# Altium PCB Digital Debugger.PcbDoc
Units mil, origin at the board's own origin, x right, y up, seen from the top; angles counter-clockwise.
Board outline 1000 x 1000 mil, 2 copper layers (Top Layer, Bottom Layer), stack 62.756 mil thick; 29 components, 37 nets, 159 pads, 23 vias.
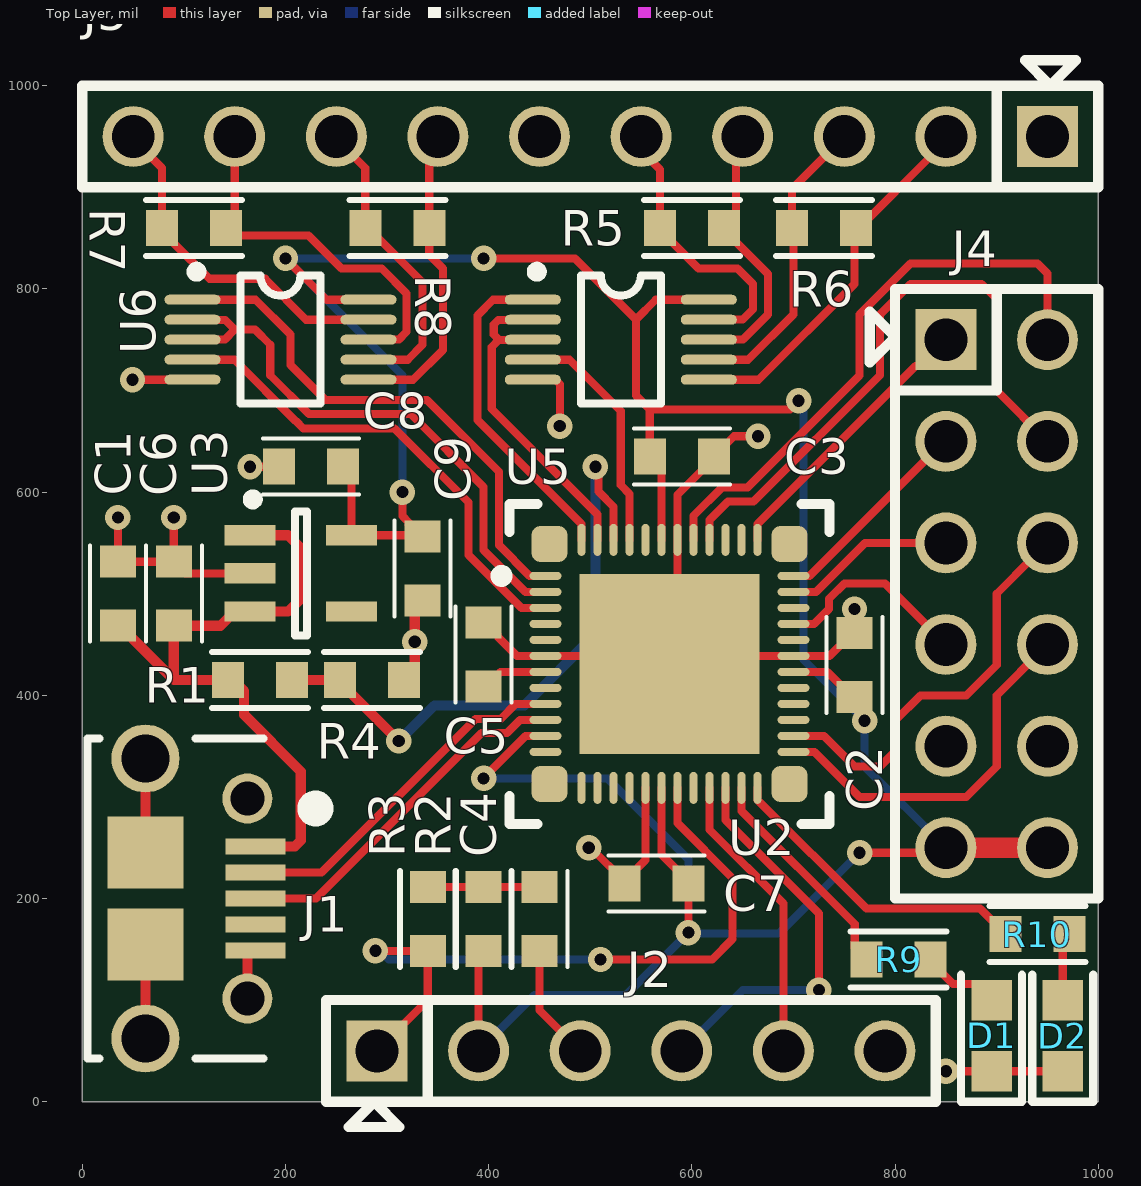
[diagram p0: Top Layer view]
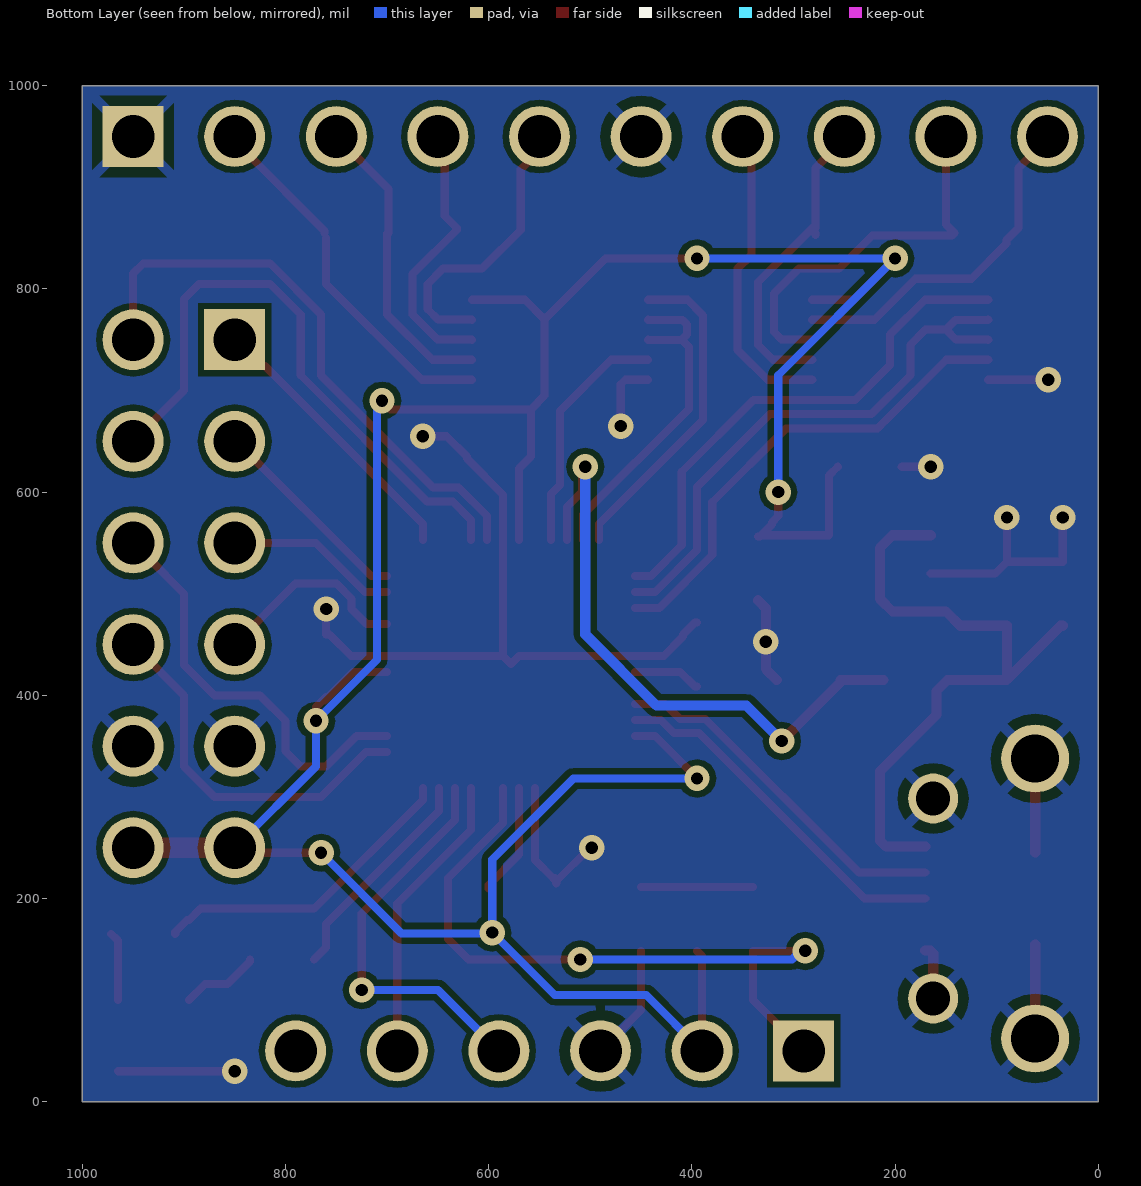
[diagram p1: Bottom Layer view, seen from below]

## Layer stack, top to bottom
Top Solder: solder mask 0.8, SM-001, Dk 4
Top Layer: signal copper 1.378
Dielectric 1: core 60, Core-043, Dk 4.3
Bottom Layer: signal copper 1.378
Bottom Solder: solder mask 0.8, SM-001, Dk 4

## Board outline
0,0 1000,0 1000,1000 0,1000

## Design rules (kind name [scope] priority, off if disabled: settings)
Clearance [All] p1: gap=6 ignorepadtopadclearanceinfootprint=FALSE
DiffPairsRouting [All] p1: maxlimit=7.87 minlimit=3.94 mostfreqgap=4.92 toplayer_minwidth=3.94 toplayer_maxwidth=7.87 toplayer_prefwidth=4.21 bottomlayer_minwidth=3.94 bottomlayer_maxwidth=7.87 bottomlayer_prefwidth=4.21 maxuncoupledlength=500
MinimumSolderMaskSliver [All] p1: minsoldermaskwidth=3
PolygonConnect [All] p1: thpad.connectstyle=Relief thpad.reliefconductorwidth=10 thpad.reliefentries=4 thpad.polygonreliefangle="45 Angle" thpad.airgapwidth=10 smdpad.connectstyle=Relief smdpad.reliefconductorwidth=10 smdpad.reliefentries=4 smdpad.polygonreliefangle="90 Angle" smdpad.airgapwidth=10 via.connectstyle=Direct via.reliefconductorwidth=10 via.reliefentries=4 via.polygonreliefangle="90 Angle" via.airgapwidth=10
RoutingVias [All] p1: holewidth=12 width=25 viastyle="Through Hole" minholewidth=10 minwidth=20 maxholewidth=30 maxwidth=50
SilkToSilkClearance [All] p1: silktosilkclearance=5
SilkToSolderMaskClearance [IsPad] p1: minsilkscreentomaskgap=5 clearancetoexposedcopper=TRUE
SolderMaskExpansion [All] p1: expansion=4 istentingtop=FALSE
Width [All] p1: maxlimit=50 minlimit=6 preferedwidth=8
26 further rules are at their usual default settings.

## Components (designator, comment, footprint, x,y, rotation, side; value= is the part's Value field where it differs from the comment)
C1 "1uF" CAP_0603 35,500 r90 top
C2 "0.1uF" CAP_0603 760,430 r90 top
C3 "1uF" CAP_0603 590,635 r0 top
C4 "0.1uF" CAP_0603 450,180 r270 top
C5 "10uF" CAP_0603 395,440 r90 top
C6 "1uF" CAP_0603 90,500 r90 top
C7 "1uF" CAP_0603 565,215 r180 top
C8 "0.1uF" CAP_0603 225,625 r180 top
C9 "0.1uF" CAP_0603 335,525 r270 top
D1 "Green" DIO_0603 895,65 r270 top
D2 "Green" DIO_0603 965,65 r270 top
J1 "10118194-0001LF" CONN_USB_MICRO_B_RA 5,200 r270 top
J2 "PREC006SAAN-RC" CONN_Male_1x6 540,50 r0 top
J4 "PREC006DAAN-RC" CONN_Male_2x6z 900,500 r0 top
J5 "PREC010SAAN-RC" CONN_Male_1x10 500,950 r180 top
R1 "10k" RES_0603 175,415 r180 top
R2 "10k" RES_0603 395,180 r270 top
R3 "1k" RES_0603 340,180 r90 top
R4 "10k" RES_0603 285,415 r180 top
R5 "120" RES_0603 600,860 r180 top
R6 "120" RES_0603 730,860 r180 top
R7 "120" RES_0603 110,860 r180 top
R8 "120" RES_0603 310,860 r180 top
R9 "1k" RES_0603 803.5,140 r0 top
R10 "1k" RES_0603 940,165 r0 top
U2 "PIC32MM0256GPM048" UQFN-48EP 577.95,430.87 r0 top
U3 "LDLN025M33R" SOT23-5 215,520 r0 top
U5 "ISL3176EIUZ-T" MSOP-10 530,750 r0 top
U6 "ISL3176EIUZ-T" MSOP-10 195,750 r0 top

## Footprints (in the part's own frame and the unit in brackets; to place one, negate y for a bottom-side part, rotate by r counter-clockwise, add the part's x,y. Pads: shape width x height; smd on the part's side, far side on the other; paste and mask are expansions set on the pad)
CAP_0603 [mm] "Capacitor, 0603"
  rect 0.8x0.9 smd: 1(-0.8,0) 2(0.8,0)
  silkscreen extent -1.2,-0.7 1.2,0.7, body extent -0.8,-0.4 0.8,0.4, height 0.86
CONN_Male_1x6 [mil]
  rect 60x60 hole 42: 1(-250,0)
  round 60 hole 42: 2(-150,0) 3(-50,0) 4(50,0) 5(150,0) 6(250,0)
  silkscreen extent -300,-75 300,50, body extent -300,-50 300,50, height 330
CONN_Male_1x10 [mil]
  rect 60x60 hole 42: 1(-450,0)
  round 60 hole 42: 2(-350,0) 3(-250,0) 4(-150,0) 5(-50,0) 6(50,0) 7(150,0) 8(250,0) 9(350,0) 10(450,0)
  silkscreen extent -500,-75 500,50, body extent -500,-50 500,50, height 330
CONN_Male_2x6z [mil]
  rect 60x60 hole 42: 1(-50,250)
  round 60 hole 42: 2(50,250) 3(-50,150) 4(50,150) 5(-50,50) 6(50,50) 7(-50,-50) 8(50,-50) 9(-50,-150) 10(50,-150) 11(-50,-250) 12(50,-250)
  silkscreen extent -125,-300 100,300, body extent -95,-300 95,300, height 323
CONN_USB_MICRO_B_RA [mm] "Amphenol FCI 10118194-0001LF"
  rect 0.4x1.5 smd mask+0.08: 1(-1.3,4.2) 2(-0.65,4.2) 3(0,4.2) 4(0.65,4.2) 5(1.3,4.2)
  round 1.7 hole 1.2: S(-3.5,1.45) S(3.5,1.45)
  round 1.25 hole 0.85: S(-2.5,4) S(2.5,4)
  rect 1.8x1.9 smd mask+0.08: S(-1.15,1.45) S(1.15,1.45)
  silkscreen extent -4,0 4,5.9, body extent -4.02,-1.34 4.02,4.36, height 2.82
DIO_0603 [mil] "Diode, 0603"
  rect 40x40 smd: A(-35,0) K(35,0)
  silkscreen extent -60,-30 65,30, body extent -35,-16 35,16, height 31
MSOP-10 [mm]
  oval 1.4x0.25 smd mask+0.07: 1(-2.2,1) 2(-2.2,0.5) 3(-2.2,0) 4(-2.2,-0.5) 5(-2.2,-1) 6(2.2,-1) 7(2.2,-0.5) 8(2.2,0) 9(2.2,0.5) 10(2.2,1)
  silkscreen extent -2.22,-1.6 1,1.82, body extent -2.52,-1.55 2.53,1.55, height 1.05
RES_0603 [mm] "Resistor, 0603"
  rect 0.8x0.9 smd: 1(-0.8,0) 2(0.8,0)
  silkscreen extent -1.2,-0.7 1.2,0.7, body extent -0.8,-0.4 0.8,0.4, height 0.61
SOT23-5 [mil]
  rect 50x20 smd: 1(-50,37.5) 2(-50,0) 3(-50,-37.5) 4(50,-37.5) 5(50,37.5)
  silkscreen extent -52,-61 6,78, body extent -49,-59 49,59, height 44
UQFN-48EP [mm] "QFN, 48-Pads, Body 6x6mm, Pitch 0.4mm"
  rrect50% 0.9x0.9 smd mask+0.05: 0(-3,-3) 0(-3,3) 0(3,-3) 0(3,3)
  oval 0.8x0.2 smd mask+0.05: 1(-3.1,2.2) 2(-3.1,1.8) 3(-3.1,1.4) 4(-3.1,1) 5(-3.1,0.6) 6(-3.1,0.2) 7(-3.1,-0.2) 8(-3.1,-0.6) 9(-3.1,-1) 10(-3.1,-1.4) 11(-3.1,-1.8) 12(-3.1,-2.2) 25(3.1,-2.2) 26(3.1,-1.8) 27(3.1,-1.4) 28(3.1,-1) 29(3.1,-0.6) 30(3.1,-0.2) 31(3.1,0.2) 32(3.1,0.6) 33(3.1,1) 34(3.1,1.4) 35(3.1,1.8) 36(3.1,2.2)
  oval 0.2x0.8 smd mask+0.05: 13(-2.2,-3.1) 14(-1.8,-3.1) 15(-1.4,-3.1) 16(-1,-3.1) 17(-0.6,-3.1) 18(-0.2,-3.1) 19(0.2,-3.1) 20(0.6,-3.1) 21(1,-3.1) 22(1.4,-3.1) 23(1.8,-3.1) 24(2.2,-3.1) 37(2.2,3.1) 38(1.8,3.1) 39(1.4,3.1) 40(1,3.1) 41(0.6,3.1) 42(0.2,3.1) 43(-0.2,3.1) 44(-0.6,3.1) 45(-1,3.1) 46(-1.4,3.1) 47(-1.8,3.1) 48(-2.2,3.1)
  rect 4.5x4.5 smd mask+0.076: EP(0,0)
  silkscreen extent -4.32,-4 4,4, body extent -3.05,-3.05 3.05,3.05, height 1

## Part data
C1 C3 C6 C7: library part 2, "Cap Cer 1uF 10V 10% X5R 0603", Manufacturer 1=Kemet, Manufacturer 2=Yageo, Manufacturer 3=N/A, Manufacturer Part Number 1=C0603C105K8PACTU, Manufacturer Part Number 2=CC0603KRX5R6BB105, Tolerance=10%, Voltage=10V, Cat=Capacitors, Internal PN=210-000002, Manufacturer 4=N/A, Other=X5R, Part Number=2, Type=Ceramic
C2 C4 C8 C9: library part 8, "Cap Cer 0.1uF 50V 10% X7R 0603", Manufacturer 1="Samsung Electro-Mechanics", Manufacturer 2=Yageo, Manufacturer 3=N/A, Manufacturer Part Number 1=CL10B104KB8NNNL, Manufacturer Part Number 2=CC0603KPX7R9BB104, Tolerance=10%, Voltage=50V, Cat=Capacitors, Internal PN=210-000008, Manufacturer 4=N/A, Other=X7R, Part Number=8, Type=Ceramic
C5: library part 11, "Cap Cer 10uF 10V 10% X5R 0603", Manufacturer 1="Samsung Electro-Mechanics", Manufacturer 2=Yageo, Manufacturer 3=N/A, Manufacturer Part Number 1=CL10A106KP8NNNC, Manufacturer Part Number 2=CC0603KRX5R6BB106, Tolerance=10%, Voltage=10V, Cat=Capacitors, Internal PN=210-000011, Manufacturer 4=N/A, Other=X5R, Part Number=11, Type=Ceramic
D1 D2: library part 13, "Dio LED Green 2V 0603", Manufacturer 1="Wurth Electronics", Manufacturer 2=N/A, Manufacturer Part Number 1=150060VS55040, Voltage=2V, Cat=Diodes, Internal PN=275-000013, Manufacturer 3=N/A, Manufacturer 4=N/A, Part Number=13, Type=LED
J1: library part 67, "Conn Receptacle 10118194-0001LF 0.65mm USB Micro B RA", Manufacturer 1=Amphenol, Manufacturer 2=N/A, Cat=Connectors, Internal PN=300-000067, Manufacturer 3=N/A, Manufacturer 4=N/A, Manufacturer Part Number 1=10118194-0001LF, Part Number=67, Type=Receptacle
J2: library part 236, "Conn HDR PREC006SAAN-RC 0.1\" 3A Male 1x6", Current=3A, Manufacturer 2=N/A, Cat=Connectors, Internal PN=300-000236, Manufacturer 3=N/A, Manufacturer 4=N/A, Manufacturer Part Number 1=PREC006SAAN-RC, Part Number=236, Type=Header
J4: library part 239, "Conn HDR PREC006DAAN-RC 0.1\" 3A Male 2x6z", Current=3A, Manufacturer 1="Sullins Connector Solutions", Manufacturer 2=N/A, Cat=Connectors, Internal PN=300-000239, Manufacturer 3=N/A, Manufacturer 4=N/A, Manufacturer Part Number 1=PREC006DAAN-RC, Part Number=239, Type=Header
J5: library part 238, "Conn HDR PREC010SAAN-RC 0.1\" 3A Male 1x10", Current=3A, Manufacturer 1="Sullins Connector Solutions", Manufacturer 2=N/A, Cat=Connectors, Internal PN=300-000238, Manufacturer 3=N/A, Manufacturer 4=N/A, Manufacturer Part Number 1=PREC010SAAN-RC, Part Number=238, Type=Header
R1 R2 R4: library part 27, "Res Thick 10k 75V 1/10W 1% 0603", Manufacturer 1=Yageo, Manufacturer 2="Stackpole Electronics", Manufacturer 3=Bourns, Manufacturer 4=N/A, Manufacturer Part Number 1=RC0603FR-0710KL, Power=1/10W, Tolerance=1%, Voltage=75V, Cat=Resistors, Internal PN=195-000027, Part Number=27, Type="Thick Film"
R3 R9 R10: library part 23, "Res Thick 1k 75V 1/10W 1% 0603", Manufacturer 1=Yageo, Manufacturer 2="Stackpole Electronics", Manufacturer 3=Bourns, Manufacturer 4=N/A, Manufacturer Part Number 1=RC0603FR-071KL, Power=1/10W, Tolerance=1%, Voltage=75V, Cat=Resistors, Internal PN=195-000023, Part Number=23, Type="Thick Film"
R5 R6 R7 R8: library part 21, "Res Thick 120 75V 1/10W 1% 0603", Manufacturer 1=Yageo, Manufacturer 2="Stackpole Electronics", Manufacturer 3=Bourns, Manufacturer 4=N/A, Manufacturer Part Number 1=RC0603FR-07120RL, Power=1/10W, Tolerance=1%, Voltage=75V, Cat=Resistors, Internal PN=195-000021, Part Number=21, Type="Thick Film"
U2: library part 234, "IC MCU PIC32MM0256GPM048 2-3.6V UQFN-48EP", Manufacturer 1=Microchip, Manufacturer 2=N/A, Voltage=2-3.6V, Cat="Integrated Circuits", Internal PN=200-000234, Manufacturer 3=N/A, Manufacturer 4=N/A, Manufacturer Part Number 1=PIC32MM0256GPM048, Part Number=234, Type=Microcontroller
U3: library part 206, "IC Reg LDO LDLN025M33R 250mA 3.3V OUT SOT23-5", Current=250mA, Manufacturer 1="ST Microelectronics", Manufacturer 2=N/A, Cat="Integrated Circuits", Internal PN=200-000206, Manufacturer 3=N/A, Manufacturer 4=N/A, Manufacturer Part Number 1=LDLN025M33R, Other="3.3V OUT", Part Number=206, Type="Regulator LDO"
U5 U6: library part 205, "IC Comm ISL3176EIUZ-T 3-3.6V RS422/RS485 FULL DUPLEX MSOP-10", Manufacturer 1=Renesas, Manufacturer 2=N/A, Voltage=3-3.6V, Cat="Integrated Circuits", Circuits="FULL DUPLEX", Internal PN=200-000205, Manufacturer 3=N/A, Manufacturer 4=N/A, Manufacturer Part Number 1=ISL3176EIUZ-T, Other=RS422/RS485, Part Number=205, Type=Communication

## Via types
v1: diameter 25, hole 12, Top Layer to Bottom Layer, 23 vias

## Nets (pads, with @x,y where several pads share a name; then routed paths per layer and width w, separated by ;. In a path a pad name is that pad's centre, name@x,y a point inside that pad or via, vN(x,y) a via of type N, cw(c..) or ccw(c..) an arc to the next point about the centre after c; other vN are vias at no path point)
+3.3V: C2.1 C3.1 C7.1 C8.1 C9.1 J2.2 J4.11 J4.12 R2.2 U2.11 U2.18 U2.30 U2.43 U3.5 U5.10 U6.10 | length 3286.3
  Top Layer w8: v1(200,830) 240.63,789.37 U6.10 ; C8.1 265,616.5 U3.5 C9.1@332.03,557.5 ; v1(315,600) 315,576.5 321.28,570.21 321.28,568.24 C9.1@332.03,557.5 ; C9.1 333.03,556.5 C9.1@332.03,557.5 ; J2.2 390,143.5 R2.2 ; v1(395,318.25) 395,318.8 436.13,359.94 455.84,359.94 U2.11 ; v1(395,830) 485,830 545,770 ; U2.18 570.08,243.39 600,213.46 C7.1@600,210 ; U2.43 570.08,623.43 C3.1 558.5,681.5 ; v1(596.5,166.5) C7.1 ; U5.10 564.37,789.37 545,770 ; U2.30 733.54,422.99 761.54,395 C2.1@763.5,395 ; v1(705,690) 696.5,681.5 558.5,681.5 ; C2.1 C2.1@763.5,395 ; v1(765,245) 845,245 J4.11 ; v1(770,375) 770,388.5 C2.1@763.5,395 ; 545,770 545,695 558.5,681.5
  Top Layer w20: J4.11 J4.12
  Bottom Layer w8: v1(315,600) 315,715 v1(200,830) v1(395,830) ; J2.2 445,105 535,105 v1(596.5,166.5) ; v1(395,318.25) 516.75,318.25 596.5,238.5 v1(596.5,166.5) ; v1(705,690) 710,685 710,435 v1(770,375) 770,330 J4.11 ; v1(765,245) 685.75,165.75 598.74,165.75 597.99,165 v1(596.5,166.5)
+5V: C1.1 C6.1 J1.1 R1.2 U3.1 U3.3 | length 662.4
  Top Layer w10: C1.1 36.97,468.5 90,415.47 ; U3.1 202.5,557.5 215,545 215,495 202.5,482.5 U3.3 150,482.5 136,468.5 C6.1 90,415.47 ; J1.1 209.14,251.18 215,257.04 215,325 159.25,380.75 159.25,404.25 148.5,415 90.47,415 90,415.47
D+: J1.3 U2.10 | length 358.3
  Top Layer w8: J1.3 230,200 392.84,362.84 417.84,362.84 430.68,375.68 455.84,375.68 U2.10
D-: J1.2 U2.9 | length 354.3
  Top Layer w8: J1.2 235.59,225.59 386.84,376.84 411.84,376.84 426.5,391.5 U2.9
GND: C1.2 C2.2 C3.2 C4.2 C5.2 C6.2 C7.2 C8.2 C9.2 D1.K D2.K J1.5 J1.S J2.3 J4.9 J4.10 J5.1 J5.6 R4.1 U2.6 U2.17 U2.31 U2.42 U2.EP U3.2 U5.5 U6.5 | length 1763.4
  Top Layer w8: v1(35,575) C1.2 C6.2 ; v1(49.37,710.63) U6.5 ; v1(90,575) C6.2 ; U3.2 101.5,520 C6.2 ; v1(165,625) C8.2 ; C5.2 396.97,471.5 408.72,459.75 408.72,457.78 427.76,438.74 U2.6 570.08,438.74 U2.EP U2.EP@585.83,438.74 ; U5.5 465.53,710.63 470,706.15 v1(470,665) ; C4.2 450,90 J2.3 ; v1(498.5,250) 500.47,250 533.5,216.97 C7.2 ; C7.2@535,220 536.54,220 554.33,237.8 U2.17 ; v1(665,655) 641.5,655 C3.2 621.5,633.03 585.83,597.36 U2.42 U2.EP@585.83,438.74 ; C2.2@760,460 756.54,460 735.28,438.74 U2.31 U2.EP@585.83,438.74 ; C2.2 v1(760,485) ; v1(850,30) D1.K D2.K
  Top Layer w10: J1.S@62.09,62.2 J1.S@62.09,154.72 ; J1.S@62.09,245.28 J1.S@62.09,337.8 ; J1.S@162.48,101.57 162.48,145.94 165.35,148.82 J1.5 ; R4.1 327.24,425.75 v1(327.24,452.76) 327.24,485.75 C9.2
I2C2_SCL: J4.6 U2.26 | length 400.9
  Top Layer w8: U2.26 730,360 760,330 785,330 800,345 800,375 825,400 870,400 900,430 900,500 935,535 J4.6@935,545
I2C2_SDA: J4.8 U2.25 | length 374.4
  Top Layer w8: U2.25 720.75,344.25 765,300 870,300 900,330 900,400 945,445 J4.8@955,445
M\C\L\R\: J2.1 R3.1 U2.19 | length 705.3
  Top Layer w8: v1(288.5,148.5) R3.1 340,100 J2.1 ; v1(510,140) 620,140 640,160 640,220 585.83,274.17 U2.19
  Bottom Layer w8: v1(288.5,148.5) 293.1,148.5 301.61,140 v1(510,140)
NetC4_1: C4.1 R2.1 R3.2 | length 110
  Top Layer w8: R3.2 R2.1 C4.1
NetC5_1: C5.1 U2.7 | length 66.9
  Top Layer w8: C5.1 396.97,408.5 411.46,422.99 U2.7
NetD1_A: D1.A R9.2 | length 77.7
  Top Layer w8: R9.2 835,138.03 857.03,116 879,116 D1.A
NetD2_A: D2.A R10.2 | length 67.7
  Top Layer w8: D2.A 965,158.5 R10.2
NetR9_1: R9.1 U2.23 | length 219.8
  Top Layer w8: U2.23 648.88,308.76 648.88,286.12 760.26,174.74 760.26,151.75 R9.1
NetR10_1: R10.1 U2.24 | length 311.5
  Top Layer w8: U2.24 664.57,297.13 771.7,190 883.5,190 894.79,178.72 896.76,178.72 908.5,166.97 R10.1
PGEC: J2.5 U2.21 | length 288.9
  Top Layer w8: U2.21 617.32,267.68 690,195 J2.5
PGED: J2.4 U2.22 | length 406.2
  Top Layer w8: J2.4 J2.4@596.7,56.7 ; U2.22 633.07,277.13 725,185.2 v1(725,110)
  Bottom Layer w8: J2.4 650,110 v1(725,110)
PMOD_INT: J4.2 U2.41 | length 579.5
  Top Layer w8: U2.41 601.64,552.98 601.64,576.74 629.59,604.69 654.89,604.69 765,714.8 765,775 815,825 940,825 950,815 J4.2
PMOD_MISO: J4.5 U2.35 | length 170
  Top Layer w8: U2.35 700.06,501.8 722,501.8 770.2,550 J4.5
PMOD_MOSI: J4.3 U2.36 | length 204.9
  Top Layer w8: U2.36 715.62,517.48 848.14,650 J4.3
PMOD_RESET: J4.4 U2.40 | length 600.7
  Top Layer w8: U2.40 617.39,552.98 617.39,572.69 635.39,590.69 660.69,590.69 785,715 785,775 815,805 885,805 900,790 900,700 J4.4
PMOD_SCLK: J4.7 U2.33 | length 197.2
  Top Layer w8: U2.33 700.06,470.3 720.3,470.3 735,485 735,495 750,510 790,510 J4.7
PMOD_SS: J4.1 U2.37 | length 276.2
  Top Layer w8: U2.37 664.57,568.54 820.03,724 824,724 J4.1
RS485_1_RX_N: J5.9 R7.1 U6.8 | length 379.3
  Top Layer w8: J5.9 150,863.5 141.5,855 144,852.5 222.5,852.5 255,820 294.72,820 319.17,795.55 319.17,757.86 311.67,750.35 281.97,750.35 U6.8
RS485_1_RX_P: J5.10 R7.2 U6.9 | length 344.4
  Top Layer w8: J5.10 50,947.61 78.5,919.11 R7.2 90.25,848.25 90.25,844.75 125,810 180,810 220.31,769.69 U6.9
RS485_1_TX_N: J5.8 R8.2 U6.7 | length 304.7
  Top Layer w8: J5.8 250,947.61 278.5,919.11 R8.2@278.5,863.03 ; R8.2@278.5,853.03 R8.2@278.5,855 ; R8.2 R8.2@278.5,863.03 ; U6.7 320.32,730.31 335,745 335,806.54 R8.2@278.5,863.03
RS485_1_TX_P: J5.7 R8.1 U6.6 | length 304.7
  Top Layer w8: U6.6 325.63,710.63 355,740 355,820 341.5,833.5 R8.1 341.5,941.5 J5.7
RS485_2_RX_N: J5.4 R5.1 U5.8 | length 269.4
  Top Layer w8: U5.8 616.97,750.35 650.35,750.35 675,775 675,814.53 631.5,858.03 R5.1 643.24,871.75 643.24,943.24 J5.4
RS485_2_RX_P: J5.5 R5.2 U5.9 | length 285.8
  Top Layer w8: J5.5 550,935.93 568.5,917.42 R5.2 568.5,858.03 606.54,820 645,820 660,805 660,780 650.04,770.04 616.97,770.04 U5.9
RS485_2_TX_N: J5.3 R6.2 U5.7 | length 297.8
  Top Layer w8: U5.7 655.32,730.31 700,775 R6.2@700,854.53 ; R6.2@698.5,855 698.5,898.5 J5.3
RS485_2_TX_P: J5.2 R6.1 U5.6 | length 355.3
  Top Layer w8: U5.6 665.63,710.63 760,805 R6.1@760,850 ; R6.1@761.5,855 761.5,856.97 839.53,935 J5.2@855,935
U1RTS: U2.2 U6.2 U6.3 | length 558.2
  Top Layer w8: U6.3 108.74,750.35 140.35,750.35 150,760 ; U6.2 108.74,769.33 140.67,769.33 150,760 ; U2.2 455.84,501.8 436.13,501.8 395,542.93 395,605 323.28,676.72 223.28,676.72 185,715 185,745 170,760 150,760
U1RX: U2.1 U6.1 | length 520
  Top Layer w8: U6.1 170.63,789.37 205,755 205,725 239.28,690.72 339.28,690.72 410,620 410,547.76 440.28,517.48 U2.1
U1TX: U2.3 U6.4 | length 479.1
  Top Layer w8: U6.4 149.68,730.31 210,670 210.2,670 217.48,662.72 307.28,662.72 380,590 380,538.13 432.08,486.05 455.84,486.05 U2.3
U2RTS: U2.47 U5.2 U5.3 | length 334.1
  Top Layer w8: U5.3 443.03,749.65 409.65,749.65 ; U5.2 443.03,769.33 409.33,769.33 405,765 405,755 409.65,750.35 409.65,749.65 ; U2.47 507.02,552.98 507.02,577.98 403,682 403,743 409.65,749.65
U2RX: U2.48 U5.1 | length 324.2
  Top Layer w8: U5.1 404.37,789.37 389,774 389,670.87 491.34,568.54 U2.48
U2TX: U2.45 U5.4 | length 238.1
  Top Layer w8: U5.4 479.68,730.31 530,680 530,606.83 538.58,598.25 U2.45
VBUS_MON: R1.1 R4.2 U2.46 | length 607.5
  Top Layer w8: v1(505,625) 507.92,622.08 507.92,600.5 522.83,585.58 U2.46
  Top Layer w10: R1.1@211.5,415 R4.2 253.5,413.03 v1(311.54,355)
  Bottom Layer w10: v1(311.54,355) 346.54,390 435,390 505,460 v1(505,625)
pads on no net: J1.4 J2.6 U2.0 U2.4 U2.5 U2.8 U2.12 U2.13 U2.14 U2.15 U2.16 U2.20 U2.27 U2.28 U2.29 U2.32 U2.34 U2.38 U2.39 U2.44 U3.4

## Polygon pours and split planes (outlines as drawn)
GND on Bottom Layer "GND_L02_P000" (solid, pour order 0): 0,0 0,1000 1000,1000 1000,0

## Silkscreen, mask and mechanical layers (free items; w line width, h text height)
Board Outline:
  the board outline again, w10